# Altium PCB PCB1.PcbDoc
Units mil, origin at the board's own origin, x right, y up, seen from the top; angles counter-clockwise.
Board outline 2620.33 x 2020.98 mil, 2 copper layers (Top Layer, Bottom Layer); 22 components, 10 nets, 71 pads, 4 vias.
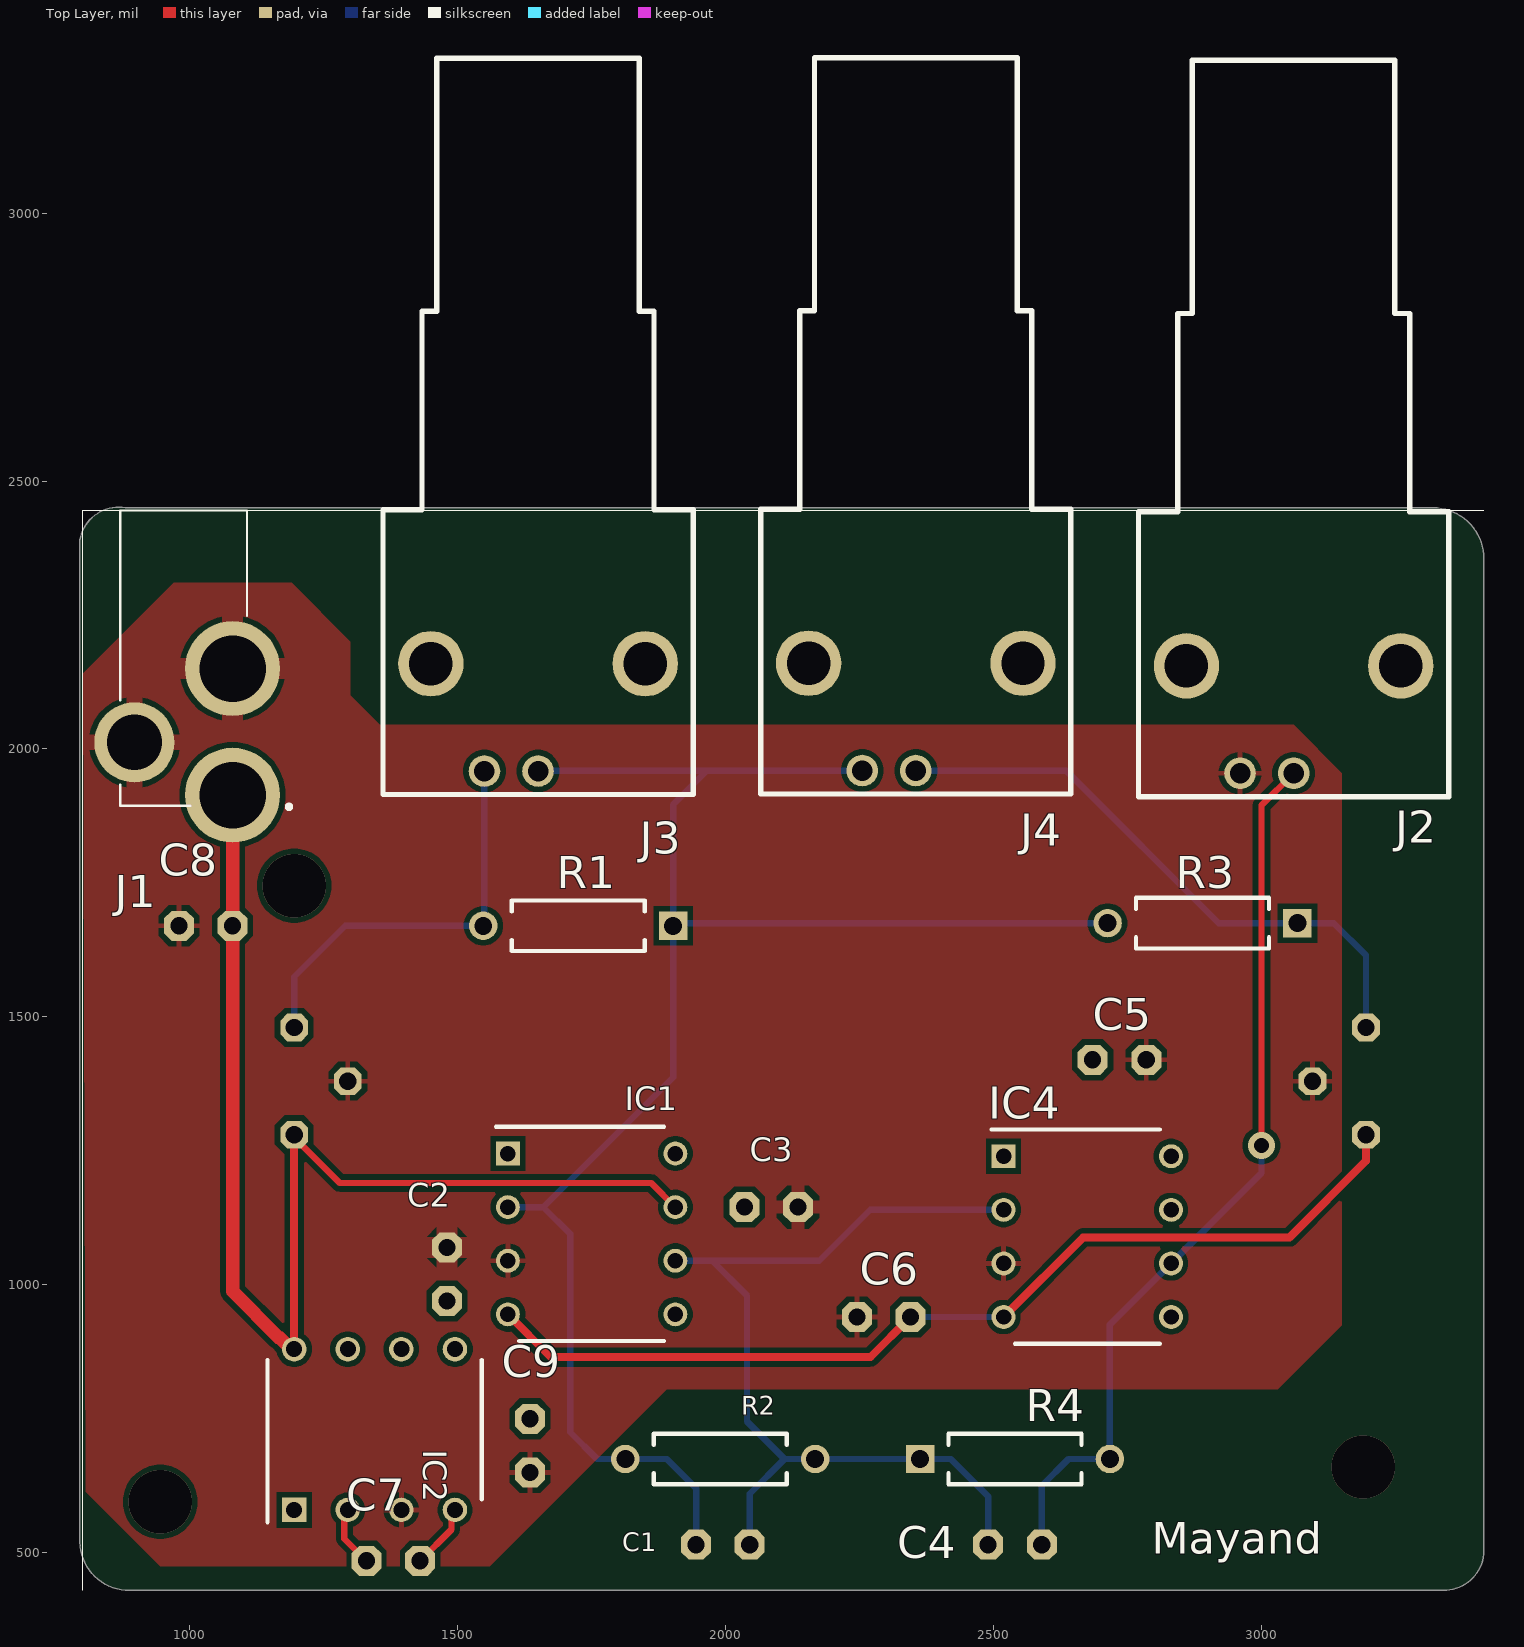
[diagram p0: Top Layer view]
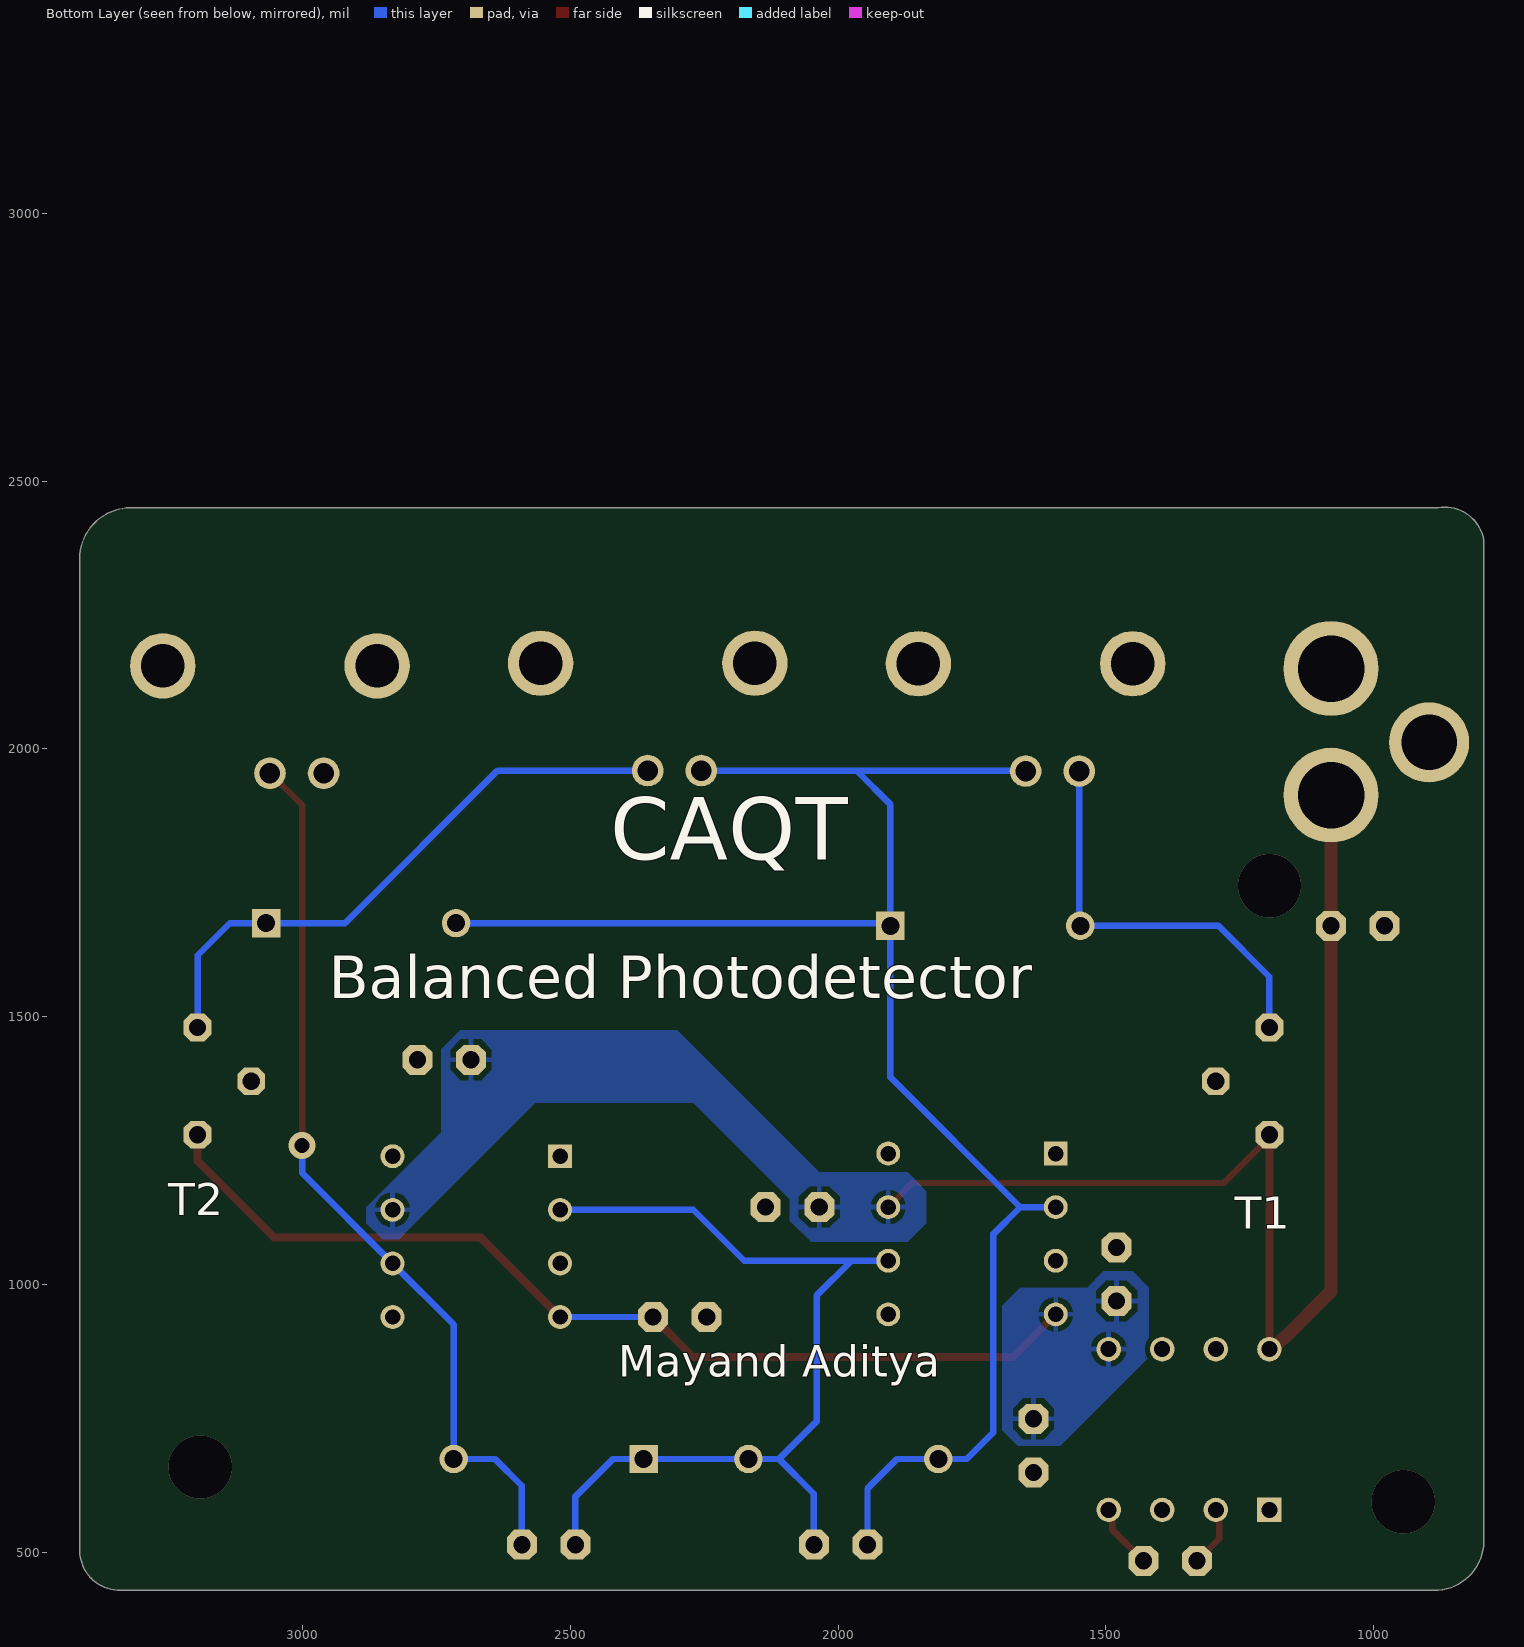
[diagram p1: Bottom Layer view, seen from below]

## Layer stack, top to bottom
Top Solder: solder mask 0.4, Solder Resist, Dk 3.5
Top Layer: signal copper 1.4
Dielectric 1: dielectric 12.6, FR-4, Dk 4.8
Bottom Layer: signal copper 1.4
Bottom Solder: solder mask 0.4, Solder Resist, Dk 3.5

## Board outline
794.73,519.99 795,2390 cw(c867.5,2377.5) 880,2450 3320,2450 cw(c3320,2355) 3415,2355 3415,510 cw(c3340,505) 3345,430 880,430 cw(c887.5,522.5)

## Design rules (kind name [scope] priority, off if disabled: settings)
Clearance [All] p1: gap=10 ignorepadtopadclearanceinfootprint=FALSE except(0: Arc-Hole Track-Hole SMDPad-Hole THPad-Hole Via-Hole Fill-Hole Poly-Hole Region-Hole Text-Hole)
PolygonConnect [All] p1: connectstyle=Relief reliefconductorwidth=10 reliefentries=4 polygonreliefangle="90 Angle" airgapwidth=10
RoutingVias [All] p1: holewidth=28 width=50 viastyle="Through Hole" minholewidth=28 minwidth=50 maxholewidth=28 maxwidth=50
SolderMaskExpansion [All] p1: expansion=4 istentingtop=FALSE
Width [All] p1: maxlimit=25 minlimit=10 preferedwidth=12
30 further rules are at their usual default settings.

## Components (designator, comment, footprint, x,y, rotation, side; value= is the part's Value field where it differs from the comment)
C1 "C-US025-030X050" C025-030X050 1995,515 r0 top
C2 "C-US025-030X050" C025-030X050 1480,1020 r90 top
C3 "C-US025-030X050" C025-030X050 2085,1145 r180 top
C4 "C-US025-030X050" C025-030X050 2540,515 r0 top
C5 "C-US025-030X050" C025-030X050 2735,1420 r180 top
C6 "C-US025-030X050" C025-030X050 2295,940 r180 top
C7 "C-US025-030X050" C025-030X050 1380,485 r0 top
C8 "C-US025-030X050" C025-030X050 1030,1670 r180 top
C9 "C-US025-030X050" C025-030X050 1635,700 r270 top
IC1 "LT1028ACN8#PBF" DIP794W53P254L1016H394Q8N 1750,1095 r0 top
IC2 "TC7662ACPA" DIP762W56P254L950H508Q8N 1345,730 r90 top
IC4 "LT1028ACN8#PBF" DIP794W53P254L1016H394Q8N 2675,1090 r0 top
J1 "DC-005-20A" DC00520A 1080,1913.78 r270 top
J2 "1-1337543-0" 1-1337543-0 3060,1910.91 r0 top
J3 "1-1337543-0" 1-1337543-0 1650,1915 r0 top
J4 "1-1337543-0" 1-1337543-0 2355,1915.91 r0 top
R1 "MFR-25FBF52-10K" RESA60-630X240#1 1725,1670 r180 top value=10k
R2 "MFR-25FBF52-10K" RESA60-630X240#2 1990,675 r0 top value=10k
R3 "MFR-25FBF52-10K" RESA60-630X240#1 2890,1675 r180 top value=10k
R4 "MFR-25FBF52-10K" RESA60-630X240#1 2540,675 r0 top value=10k
T1 "2N2102" TO5 1195,1380 r0 bottom
T2 "2N2102" TO5 3195,1380 r180 bottom

## Footprints (in the part's own frame and the unit in brackets; to place one, negate y for a bottom-side part, rotate by r counter-clockwise, add the part's x,y. Pads: shape width x height; smd on the part's side, far side on the other; paste and mask are expansions set on the pad)
1-1337543-0 [mm]
  round 1.5 hole 0.97: 1(-2.54,1.112) 2(0,1.112)
  round 3.1 hole 2.06: 3(5.08,6.2) 4(-5.08,6.2)
  silkscreen extent -7.35,0 7.35,34.9, body extent -7.24,-1.08 7.46,34.42, height 15.62
C025-030X050 [mil]
  oct 56x56 / inner round 51.74 / far side oct 56x56 hole 32: 1(-50,0) 2(50,0)
DC00520A [mm]
  round 4.5 hole 3.15: 1(0,0) 2(-6,0)
  round 3.8 hole 2.625: 3(-2.5,-4.65)
  silkscreen extent -13.5,-5.33 0.6,2.72, body extent -13.49,-4.89 0.81,4.51, height 11.15
DIP762W56P254L950H508Q8N [mm]
  rect 1.16x1.16 hole 0.76: 1(-3.81,3.81)
  round 1.16 hole 0.76: 2(-3.81,1.27) 3(-3.81,-1.27) 4(-3.81,-3.81) 5(3.81,-3.81) 6(3.81,-1.27) 7(3.81,1.27) 8(3.81,3.81)
  silkscreen extent -4.39,-5.08 3.3,5.08, body extent -3.95,-4.75 3.95,4.75, height 5.08
DIP794W53P254L1016H394Q8N [mil]
  rect 44.61x44.61 hole 28.86: 1(-156.26,150)
  round 44.61 hole 28.86: 2(-156.26,50) 3(-156.26,-50) 4(-156.26,-150) 5(156.26,-150) 6(156.26,-50) 7(156.26,50) 8(156.26,150)
  silkscreen extent -179,-200 135,200, body extent -161,-200 161,200, height 155
RESA60-630X240#1 [mm] "Axial Resistor, 2-Leads, Dia 2.4mm, Body Length 6.3mm"
  rect 1.35x1.35 hole 0.85: 1(-4.5,0)
  round 1.35 hole 0.85: 2(4.5,0)
  silkscreen extent -3.15,-1.2 3.15,1.2, body extent -4.77,-1.19 4.77,1.2, height 2.4
RESA60-630X240#2 [mm] "Axial Resistor, 2-Leads, Dia 2.4mm, Body Length 6.3mm"
  round 1.35 hole 0.85: 1(-4.5,0) 2(4.5,0)
  silkscreen extent -3.15,-1.2 3.15,1.2, body extent -4.77,-1.19 4.77,1.2, height 2.4
TO5 [mil]
  oct 52x52 / inner round 48.04 / far side oct 52x52 hole 32: 1(0,-100) 2(100,0) 3(0,100)

## Part data
C1 C2 C3 C4 C5 C6 C7 C8 C9: "CAPACITOR, American symbol", DeviceName=025-030X050, DeviceSetName=C-US, GateName_1=G$1, LibraryName=adafruit, SymbolName_1=C-US
IC1 IC4: "Integrated Circuit", Manufacturer_Name="Linear Technology", Datasheet Link=http://cds.linear.com/docs/en/datasheet/1028fd.pdf, Height=3.937mm, Manufacturer_Part_Number=LT1028ACN8#PBF
IC2: "Integrated Circuit", Manufacturer_Name=Microchip, Mouser Part Number=579-TC7662ACPA, Arrow Part Number=TC7662ACPA, Arrow Price/Stock=https://www.arrow.com/en/products/tc7662acpa/microchip-technology?region=nac, Datasheet Link=http://componentsearchengine.com/Datasheets/3/TC7662ACPA.pdf, Height=5.08mm, Manufacturer_Part_Number=TC7662ACPA, Mouser Price/Stock=https://www.mouser.co.uk/ProductDetail/Microchip-Technology/TC7662ACPA?qs=3huTxzs8ogqC%2FBEmAt4AWg%3D%3D
J1: "Connector", Manufacturer_Name="Korean Hroparts Elec", Datasheet Link=https://datasheet.lcsc.com/szlcsc/Korean-Hroparts-Elec-DC-005-20A_C130239.pdf, Height=11mm, Manufacturer_Part_Number=DC-005-20A
J2 J3 J4: "Connector", Manufacturer_Name="TE Connectivity", Mouser Part Number=571-1-1337543-0, Arrow Part Number=1-1337543-0, Arrow Price/Stock=https://www.arrow.com/en/products/1-1337543-0/te-connectivity?region=nac, Datasheet Link=http://www.te.com/commerce/DocumentDelivery/DDEController?Action=srchrtrv&DocNm=1337543&DocType=Customer+Drawing&DocLang=English, Manufacturer_Part_Number=1-1337543-0, Mouser Price/Stock=https://www.mouser.co.uk/ProductDetail/TE-Connectivity-AMP/1-1337543-0?qs=C39VGJgkyqP7s5Z2V1r6VA%3D%3D
R1 R2 R3 R4: library part CMP-009-00047-4, "Axial Resistor, 10 KOhm, +/- 1%, 0.25 W, -55 to 155 degC, 2-Pin THD, RoHS, Bulk", Case/Package=Axial, Manufacturer=Yageo, Max Operating Temperature=155°C, Min Operating Temperature=-55°C, Package Description="2-Pin Axial Lead, Dia 2.4 mm, Body Length 6.3 mm", Package Quantity=200, Package Reference=MFR-25, Power=250mW, Tolerance=1%, Voltage Rating=250V, Datasheet URL=http://www.yageo.com/documents/recent/Yageo%20LR_MFR_2013.pdf, Datasheet Version=Apr-13, Manufacturer URL=http://www.yageo.com/, Mounting Technology=TH, Packaging=Bulk, RoHS Compliant=True
T1 T2: "NPN TRANSISTOR", DeviceSetName=2N2102, GateName_1=G$1, LibraryName=transistor, POPULARITY=0, SymbolName_1=NPN

## Via types
v1: diameter 118.11, hole 118.11, Top Layer to Bottom Layer, 3 vias
v2: diameter 50, hole 28, Top Layer to Bottom Layer, 1 vias

## Nets (pads, with @x,y where several pads share a name; then routed paths per layer and width w, separated by ;. In a path a pad name is that pad's centre, name@x,y a point inside that pad or via, vN(x,y) a via of type N, cw(c..) or ccw(c..) an arc to the next point about the centre after c; other vN are vias at no path point)
+5V: C3.2 C5.2 C8.1 IC1.7 IC2.8 IC4.7 J1.1 T1.3 | length 2250.6
  Top Layer w12: T1.3 1195,1275 1280,1190 1861.26,1190 IC1.7
  Top Layer w15: IC2.8 T1.3@1195,1275
  Top Layer w25: J1.1 1080,987.97 1166.5,901.47 1167.94,901.47 1189.41,880 IC2.8
-5V: C2.1 C6.1 C9.1 IC1.4 IC2.5 IC4.4 T2.1 | length 1834.7
  Top Layer w15: IC1.4 1673.74,865 2270,865 C6.1 ; IC4.4 2667.32,1088.58 3052.08,1088.58 3195,1231.5 T2.1
  Bottom Layer w12: C6.1 IC4.4
GND: C2.2 C3.1 C5.1 C6.2 C8.2 C9.2 IC1.3 IC2.3 IC4.3 J1.2 J1.3 J2.1 T1.2 T2.2
I_diff: C1.1 IC1.2 J3.2 J4.1 R1.1 R2.1 R3.2 | length 3247.9
  Bottom Layer w12: IC1.2 1660,1145 ; J3.2@1650.45,1959.23 1965,1959.23 ; C1.1 1945,620 1890,675 R2.1 1760,675 1710,725 1710,1095 1660,1145 ; J4.1@2254.55,1959.23 1965,1959.23 ; R3.2 1907.17,1675 R1.1 ; 1660,1145 1902.17,1387.17 R1.1 ; R1.1 1902.17,1675 1902.17,1896.4 1965,1959.23
NetC1_2: C1.2 C4.1 IC1.6 IC4.2 R2.2 R4.1 | length 1763.7
  Bottom Layer w12: IC1.6 1975,1045 ; C1.2 2045,610 2110,675 ; C4.1 2490,605 2420,675 R4.1 R2.2 2110,675 ; IC4.2 2270,1140 2175,1045 1975,1045 ; 1975,1045 2040,980 2040,745 2110,675
NetC4_2: C4.2 IC4.6 J2.2 R4.2 | length 1679.6
  Top Layer w12: v2(3000,1260) 3000,1894.68 J2.2
  Bottom Layer w12: C4.2 2590,625 2640,675 R4.2 2717.17,925.91 IC4.6 3000,1208.74 v2(3000,1260)
NetC7_1: C7.1 IC2.2 | length 114.8
  Top Layer w12: IC2.2 1288.56,573.56 1288.56,526.44 C7.1
NetC7_2: C7.2 IC2.4 | length 121.9
  Top Layer w12: C7.2 1488.56,543.56 1488.56,573.56 IC2.4
NetJ3_1: J3.1 R1.2 T1.1 | length 773.8
  Bottom Layer w12: T1.1 1195,1575 1290,1670 R1.2 ; R1.2@1550,1672.17 J3.1
NetJ4_2: J4.2 R3.1 T2.3 | length 1117.8
  Bottom Layer w12: J4.2 2635.32,1959.68 2920,1675 R3.1 3135,1675 3195,1615 T2.3
pads on no net: IC1.1 IC1.5 IC1.8 IC2.1 IC2.6 IC2.7 IC4.1 IC4.5 IC4.8 J2.3 J2.4 J3.3 J3.4 J4.3 J4.4
copper on no net:
  other v1: 945,595 3190,660 1195,1745

## Polygon pours and split planes (outlines as drawn)
-5V on Bottom Layer "-5V_L02_P009" (solid, pour order 9): 1450,1025 1420,995 1420,865 1585,700 1665,700 1695,730 1695,960 1660,995 1535,995 1505,1025
+5V on Bottom Layer "+5V_L02_P003" (solid, pour order 3): 2705,1475 2740,1440 2740,1285 2880,1145 2880,1115 2850,1085 2820,1085 2565,1340 2270,1340 2090,1160 2090,1120 2050,1080 1870,1080 1835,1115 1835,1175 1870,1210 2035,1210 2300,1475
GND on Top Layer "GND_L01_P005" (solid, pour order 5): 801.01,2141.01 970,2310 1190,2310 1300,2200 1300,2100 1355,2045 3060,2045 3150,1955 3150,925 3030,805 1890,805 1560,475 945,475 806.08,613.92

## Silkscreen, mask and mechanical layers (free items; w line width, h text height)
Top Overlay:
  lines w0: 800,430 800,2445 3415,2445
  text "Mayand" at 2795,478.78 h100
Bottom Overlay:
  text "CAQT" at 2425,1755 h200
  text "Balanced Photodetector" at 2950,1535 h80
  text "Mayand Aditya" at 2410,808.78 h100
Mechanical 1:
  the board outline again, w10

## Dimensions
3190,660 to 3345,430 on Top Overlay
3190,660 to 3415,510 on Top Overlay
945,595 to 795,519.99 on Top Overlay
805,910 to 3415,510 on Top Overlay
880,2450 to 880,430 on Top Overlay
945,595 to 750,430 on Top Overlay
3195,490 to 1195,465 on Top Overlay
5160,380 to 5210,1380 on Top Overlay